# Altium PCB Twitch_Switch_PCB.PcbDoc (part 2 of 3)
Units mil, origin at the board's own origin, x right, y up, seen from the top; angles counter-clockwise.
Board outline 3095 x 1923 mil, 2 copper layers (Top Layer, Bottom Layer); 103 components, 59 nets, 319 pads, 189 vias.
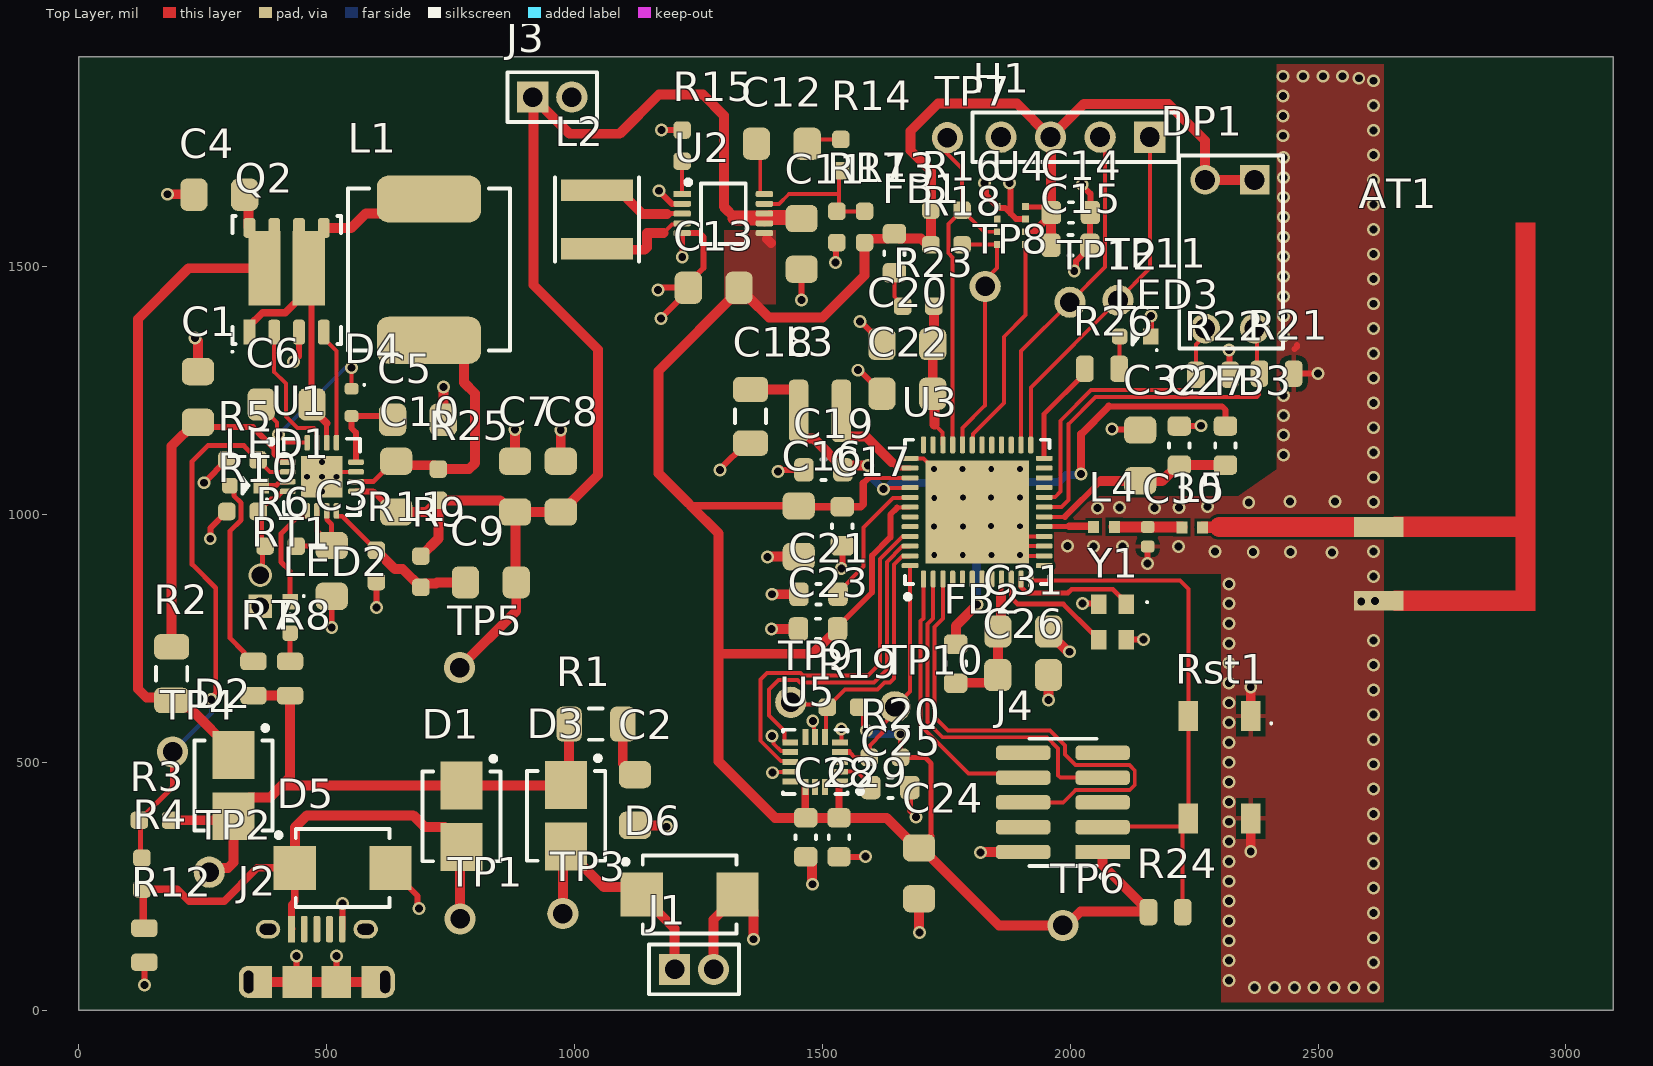
[diagram p0: Top Layer view]

## Part data (continued)
J2: "10118194-0001LF micro-USB paste-in-pad", Color=Black, Current Rating="1.8 A", Flammability Rating="UL 94 V-0", Insulation Resistance="1000 MOhms", Manufacturer=FCI, Manufacturer Part Number=10118194-0001LF, Operating Temperature Range="- 55 C to + 85 C", Supplier Part Number 1=609-4618-1-ND, .Creator="Kailey Shara", .PCBchecked=KS, .SCHchecked=KS, Brand=FCI, Category="Connectors, Interconnects", ComponentLink1Description=http://portal.fciconnect.com/Comergent//fci/drawing/10118194.pdf, ComponentLink1URL=http://portal.fciconnect.com/Comergent//fci/drawing/10118194.pdf, Connector Type="USB - micro B", Contact Material="Copper Alloy", Contact Plating=Gold, Features="Shielded, Solder Retention", Gender=Receptacle, Ingress Protection=-, Minimum Order Quantity=1, Mounting Angle=Right, Mounting Type="Surface Mount, Right Angle, Horizontal", Number of Contacts=5, Packaging="Cut Tape (CT)", Pricing 1="1=0.46, 10=0.433, 25=0.3712, 50=0.3156, 100=0.3032, 250=0.27224, 500=0.25988 (USD)", Product="Micro USB Type B Connectors", Reeling=True, RoHS="RoHS Compliant", Specifications="USB 2.0", Standard="USB 2.0", Standard Pack Qty=1200, Stock 1=27978, Supplier 1=Digi-Key, Termination Style=SMD
J4: library part FTSH-105-01-L-DV-K-TR, "SAMTEC - FTSH-105-01-L-DV-K-TR - Pin Header, Wire-to-Board, 1.27 mm, 2 Rows, 10 Contacts, Surface Mount, FTSH Series", Color=Black, Current Rating=1.75A, Manufacturer=Samtec, Max Operating Temperature=125°C, Min Operating Temperature=-55°C, Package Quantity=550, Category="Headers and Wire Housings", ComponentLink1Description=https://datasheet.ciiva.com/10245/ftsh-mt-10245289.pdf?src-supplier=Avnet, ComponentLink1URL=https://datasheet.ciiva.com/10245/ftsh-mt-10245289.pdf?src-supplier=Avnet, ComponentLink2Description=https://datasheet.ciiva.com/739/ftsh-1xx-xx-xxx-dv-xxx-mkt-739005.pdf?src-supplier=Digi-Key, ComponentLink2URL=https://datasheet.ciiva.com/739/ftsh-1xx-xx-xxx-dv-xxx-mkt-739005.pdf?src-supplier=Digi-Key, ComponentLink3Description=https://datasheet.ciiva.com/23735/81359-23735917.pdf?src-supplier=Newark, ComponentLink3URL=https://datasheet.ciiva.com/23735/81359-23735917.pdf?src-supplier=Newark, Connector Type="Male Pin", Contact Material=Bronze, Contact Mating Length=0.12inch, Contact Plating=Gold, Contact Type="Male Pin", Depth=3.43mm, Gender=Male, Housing Color=Black, Housing Material=Polymer, Lead Free="Lead Free", Length=6.35mm, Manufacturer Part Number=FTSH-105-01-L-DV-K-TR, Max Current Rating=1.75A, Mount="Surface Mount", Number of Contacts=10, Number of Positions=10, Number of Rows=2, Orientation=Straight, Packaging="Tape and Reel", Pitch=1.27mm, Pricing 1="1=3.28000, 10=3.14400, 100=2.62000 (USD)", Radiation Hardening=No, REACH SVHC="No SVHC", RoHS=Yes, RoHS Compliant=Yes, Row Spacing=0.05inch, Series=FTSH, Stock 1=12516, Supplier 1=Digi-Key, Termination=Solder
L1: library part IHLP3232DZER150M11, "Inductor High Current Shielded Wirewound 15uH 20% 100KHz 4.9A 65.3mOhm DCR 3232 T/R", Case/Package=3232, Current Rating=4.9A, DC Resistance (DCR)=65.3mR, Inductance=15uH, Inductance Tolerance=20%, Manufacturer="Vishay Dale", Max DC Current=3.7A, Max Operating Temperature=125°C, Min Operating Temperature=-55°C, Package Quantity=500, Self Resonant Frequency=10.3MHz, Test Frequency=100kHz, Category="Fixed Inductors", ComponentLink1Description=https://datasheet.ciiva.com/6692/ihlp-3232dz-11-6692869.pdf?src-supplier=Digi-Key, ComponentLink1URL=https://datasheet.ciiva.com/6692/ihlp-3232dz-11-6692869.pdf?src-supplier=Digi-Key, ComponentLink2Description=https://datasheet.ciiva.com/6692/ihlp-3232dz-11-6692871.pdf?src-supplier=Digi-Key, ComponentLink2URL=https://datasheet.ciiva.com/6692/ihlp-3232dz-11-6692871.pdf?src-supplier=Digi-Key, ComponentLink3Description=https://datasheet.ciiva.com/6692/ihlp-3232dz-11-6692872.pdf?src-supplier=Digi-Key, ComponentLink3URL=https://datasheet.ciiva.com/6692/ihlp-3232dz-11-6692872.pdf?src-supplier=Digi-Key, ComponentLink4Description=https://datasheet.ciiva.com/8494/ihlp3232dz11-8494905.pdf?src-supplier=Avnet, ComponentLink4URL=https://datasheet.ciiva.com/8494/ihlp3232dz11-8494905.pdf?src-supplier=Avnet, Contact Plating=Tin, Core Material=Ferrite, Depth=8.26mm, Height=4mm, Height - Seated (Max)=0.157inch, Lead Free="Lead Free", Length=8.89mm, Manufacturer Part Number=IHLP3232DZER150M11, Military Standard=Not, Mount="Surface Mount", Number of Pins=2, Packaging="Tape and Reel", Pricing 1="1=1.37000, 10=1.26800, 25=1.17040, 50=0.97520, 100=0.91670, 250=0.81916 (USD)", Radiation Hardening=No, REACH SVHC=Unknown, RMS Current (Irms)=4.9A, RoHS=Yes, RoHS Compliant=Yes, Saturation Current=3.7A, Series=IHLP-3232DZ-11, Shielding=Shielded, Stock 1=5273, Supplier 1=Digi-Key, Termination=SMD/SMT, Tolerance=20%, Width=0.322inch
L2: library part TYA4020100M-10, "FIXED IND 10UH 2A 220 MOHM SMD", Manufacturer=Laird, Manufacturer Part Number=TYA4020100M-10, RoHS=No, Supplier 1=Digi-Key
L3: library part 744029004, "Inductor, SMD Temperature range: -40 ... +125 °C Size: 2813: A/B/C/D/E = 2.8/2.8/1.35/0.9/0.9 mm Tolerance: ±30% Type...", Case/Package=Nonstandard, Current Rating=1A, DC Resistance (DCR)=200mR, Inductance=4.7uH, Inductance Tolerance=30%, Manufacturer="Wurth Electronics", Max DC Current=1.2A, Max Operating Temperature=125°C, Min Operating Temperature=-40°C, Package Quantity=1200, Resistor Type=Wirewound, Saturation Current=800mA, Self Resonant Frequency=65MHz, Test Frequency=100kHz, Category="Fixed Inductors", ComponentLink1Description=https://datasheet.ciiva.com/11802/0900766b80d7f1cb-11802019.pdf?src-supplier=RSComponents, ComponentLink1URL=https://datasheet.ciiva.com/11802/0900766b80d7f1cb-11802019.pdf?src-supplier=RSComponents, ComponentLink2Description=https://datasheet.ciiva.com/1050/744029004-1050762.pdf?src-supplier=Digi-Key, ComponentLink2URL=https://datasheet.ciiva.com/1050/744029004-1050762.pdf?src-supplier=Digi-Key, ComponentLink3Description=https://datasheet.ciiva.com/4961/744029004-72684-4961071.pdf?src-supplier=Mouser, ComponentLink3URL=https://datasheet.ciiva.com/4961/744029004-72684-4961071.pdf?src-supplier=Mouser, ComponentLink4Description=https://datasheet.ciiva.com/22702/69358-22702629.pdf?src-supplier=Element14, ComponentLink4URL=https://datasheet.ciiva.com/22702/69358-22702629.pdf?src-supplier=Element14, ComponentLink5Description=https://datasheet.ciiva.com/1050/744029004-1050763.pdf?src-supplier=Digi-Key, ComponentLink5URL=https://datasheet.ciiva.com/1050/744029004-1050763.pdf?src-supplier=Digi-Key, ComponentLink6Description=https://datasheet.ciiva.com/1050/744029004-1050764.pdf?src-supplier=Digi-Key, ComponentLink6URL=https://datasheet.ciiva.com/1050/744029004-1050764.pdf?src-supplier=Digi-Key, ComponentLink7Description=https://datasheet.ciiva.com/14123/744029004-ch-ger-eng-ds-14123820.pdf?src-supplier=Distrelec, ComponentLink7URL=https://datasheet.ciiva.com/14123/744029004-ch-ger-eng-ds-14123820.pdf?src-supplier=Distrelec, Core Material=Ferrite, Depth=2.8mm, Height=1.35mm, Height - Seated (Max)=0.059inch, Length=2.8mm, Manufacturer Part Number=744029004, Mount="Surface Mount", Number of Pins=2, Packaging="Cut Tape", Pricing 1="1=1.43000, 10=1.38900, 50=1.21500, 100=1.14600, 500=0.98000 (USD)", REACH SVHC=Unknown, RMS Current (Irms)=1A, RoHS=Yes, RoHS Compliant=Yes, Series=WE-TPC, Series Resistance=200mR, Shielding=Shielded, Stock 1=14904, Supplier 1=Digi-Key, Termination=SMD/SMT, Tolerance=30%, Width=2.8mm
L4 L5: library part LQG15HS22NJ02D, "Fixed Inductors 22nH 5% Hi-Freq", Case Code (Imperial)=0402, Case Code (Metric)=1005, Current Rating=300mA, DC Resistance (DCR)=420mR, Inductance=22nH, Manufacturer=Murata, Max Operating Temperature=125°C, Min Operating Temperature=-55°C, Package Quantity=10000, Self Resonant Frequency=1.9GHz, Test Frequency=100MHz, Tolerance=5%, Case/Package=0402, Category="Fixed Inductors", ComponentLink1Description=https://datasheet.ciiva.com/11801/0900766b80f10809-11801427.pdf?src-supplier=RSComponents, ComponentLink1URL=https://datasheet.ciiva.com/11801/0900766b80f10809-11801427.pdf?src-supplier=RSComponents, ComponentLink2Description=https://datasheet.ciiva.com/18088/getdatasheetpartid-55811-18088843.pdf?src-supplier=Verical, ComponentLink2URL=https://datasheet.ciiva.com/18088/getdatasheetpartid-55811-18088843.pdf?src-supplier=Verical, ComponentLink3Description=https://datasheet.ciiva.com/1038/l0075s0083lqg15hs-1038108.pdf?src-supplier=Digi-Key, ComponentLink3URL=https://datasheet.ciiva.com/1038/l0075s0083lqg15hs-1038108.pdf?src-supplier=Digi-Key, ComponentLink4Description=https://datasheet.ciiva.com/3082/l0075s0083lqg15hs-3082178.pdf?src-supplier=Avnet, ComponentLink4URL=https://datasheet.ciiva.com/3082/l0075s0083lqg15hs-3082178.pdf?src-supplier=Avnet, ComponentLink5Description=https://datasheet.ciiva.com/16444/l0075s0083lqg15hs-16444393.pdf?src-supplier=Future+Electronics, ComponentLink5URL=https://datasheet.ciiva.com/16444/l0075s0083lqg15hs-16444393.pdf?src-supplier=Future+Electronics, ComponentLink6Description=https://datasheet.ciiva.com/1038/l0075s0083lqg15hs-1038106.pdf?src-supplier=Digi-Key, ComponentLink6URL=https://datasheet.ciiva.com/1038/l0075s0083lqg15hs-1038106.pdf?src-supplier=Digi-Key, ComponentLink7Description=https://datasheet.ciiva.com/17279/l0075s0083lqg15hs-17279242.pdf?src-supplier=Avnet+Europe, ComponentLink7URL=https://datasheet.ciiva.com/17279/l0075s0083lqg15hs-17279242.pdf?src-supplier=Avnet+Europe, ComponentLink8Description=https://datasheet.ciiva.com/1038/l0075s0083lqg15hs-1038107.pdf?src-supplier=Digi-Key, ComponentLink8URL=https://datasheet.ciiva.com/1038/l0075s0083lqg15hs-1038107.pdf?src-supplier=Digi-Key, Core Material=Air, DC Current=300mA, Depth=0.55mm, Height=0.5mm, Height - Seated (Max)=0.022inch, Lead Free="Lead Free", Length=1mm, Manufacturer Part Number=LQG15HS22NJ02D, Max DC Current=300mA, Military Standard=Not, Mount="Surface Mount", Packaging="Tape and Reel", Pricing 1="1=0.10000, 10=0.05300, 25=0.04680, 50=0.03980, 100=0.03510, 250=0.03216, 500=0.02924, 1000=0.02457, 2500=0.02106 (USD)", Q Factor=8, Radiation Hardening=No, Rated Current-Max=300mA, RoHS=Yes, RoHS Compliant=Yes, Series=LQG15HS, Shielding=Unshielded, Stock 1=109500, Supplier 1=Digi-Key, Termination=SMD/SMT, Width=0.02inch
LED1 LED2 LED3: library part 150060GS75000, "LED, 0603, GREEN, 430MCD, 520NM", Color=Green, Current - Test=20mA, Manufacturer="Wurth Electronics", Millicandela Rating=430mcd, Package / Case="0603 (1608 Metric)", Standard Package=4,000, Supplier Part Number 1=732-4971-1-ND, Voltage - Forward (Vf) (Typ)=3.2V, 3D Model="SMCW_0603.igs /  / SMCW_0603.stp /  / SMCW_0603.wrl", Category=Optoelectronics, ComponentLink1Description=https://katalog.we-online.de/led/datasheet/150060GS75000.pdf?src-supplier=Digi-Key, ComponentLink1URL=https://katalog.we-online.de/led/datasheet/150060GS75000.pdf?src-supplier=Digi-Key, ComponentLink2Description=http://www.produktinfo.conrad.com/datenblaetter/750000-774999/759427-da-01-en-CHIPLED_0603_W_KL_GRUEN_150060GS75000.pdf?src-supplier=Conrad, ComponentLink2URL=http://www.produktinfo.conrad.com/datenblaetter/750000-774999/759427-da-01-en-CHIPLED_0603_W_KL_GRUEN_150060GS75000.pdf?src-supplier=Conrad, Dynamic Catalog="0603 Rectangle with Flat Top Chip LEDs", Family="LED Indication - Discrete", Height=0.70mm, Lens Style/Size="Rectangle with Flat Top, 1.1mm x 0.7mm", Lens Type=Clear, Manufacturer Part Number=150060GS75000, Mounting Type="Surface Mount", Online Catalog="0603 Rectangle with Flat Top Chip LEDs", Other Names=732-4971-2, Packaging="Tape & Reel (TR)", Pricing 1="1=0.14, 50=0.129, 100=0.11, 500=0.095 (USD)", Series=WL-SMCW, Size / Dimension="1.60mm L x 0.80mm W", Stock 1=34964, Supplier 1=Digi-Key, Viewing Angle=140°, Wavelength - Dominant=520nm, Wavelength - Peak=515nm
Q2: library part SI7288DP-T1-GE3, "VISHAY - SI7288DP-T1-GE3 - MOSFET, DUAL N-CH, 40V, 20A, POWERPAK SO", Continuous Drain Current (ID)=20A, Drain to Source Breakdown Voltage=40V, Drain to Source Resistance=15.6mR, Gate to Source Voltage (Vgs)=20V, Input Capacitance=565pF, Manufacturer="Vishay Siliconix", Max Operating Temperature=150°C, Max Power Dissipation=15.6W, Min Operating Temperature=-55°C, On-State Resistance=19mR, Package Quantity=1, Power Dissipation=3.6W, Threshold Voltage=2.8V, Category=MOSFETs, ComponentLink1Description=https://datasheet.ciiva.com/1253/si7288dp-1253714.pdf?src-supplier=Newark, ComponentLink1URL=https://datasheet.ciiva.com/1253/si7288dp-1253714.pdf?src-supplier=Newark, ComponentLink2Description=https://datasheet.ciiva.com/4442/si7288dp-244449-4442467.pdf?src-supplier=Mouser, ComponentLink2URL=https://datasheet.ciiva.com/4442/si7288dp-244449-4442467.pdf?src-supplier=Mouser, ComponentLink3Description=https://datasheet.ciiva.com/928/si7288dp-928419.pdf?src-supplier=Digi-Key, ComponentLink3URL=https://datasheet.ciiva.com/928/si7288dp-928419.pdf?src-supplier=Digi-Key, ComponentLink4Description=https://datasheet.ciiva.com/928/si7288dp-928420.pdf?src-supplier=Digi-Key, ComponentLink4URL=https://datasheet.ciiva.com/928/si7288dp-928420.pdf?src-supplier=Digi-Key, ComponentLink5Description=https://datasheet.ciiva.com/928/si7288dp-928421.pdf?src-supplier=Digi-Key, ComponentLink5URL=https://datasheet.ciiva.com/928/si7288dp-928421.pdf?src-supplier=Digi-Key, ComponentLink6Description=https://datasheet.ciiva.com/11161/si7288dp-11161495.pdf?src-supplier=Avnet, ComponentLink6URL=https://datasheet.ciiva.com/11161/si7288dp-11161495.pdf?src-supplier=Avnet, ComponentLink7Description=https://datasheet.ciiva.com/26135/si7288dp-26135833.pdf?src-supplier=Avnet+Europe, ComponentLink7URL=https://datasheet.ciiva.com/26135/si7288dp-26135833.pdf?src-supplier=Avnet+Europe, ComponentLink8Description=https://datasheet.ciiva.com/16287/si7288dp-16287085.pdf?src-supplier=Future+Electronics, ComponentLink8URL=https://datasheet.ciiva.com/16287/si7288dp-16287085.pdf?src-supplier=Future+Electronics, Contact Plating=Tin,Matte, Drain to Source Voltage (Vdss)=40V, Element Configuration=Dual, Fall Time=10ns, FET Type="2 N-Channel", Lead Free="Lead Free", Manufacturer Part Number=SI7288DP-T1-GE3, Mount="Surface Mount", Nominal Vgs=1.2V, Number of Channels=2, Number of Elements=2, Number of Pins=8, Packaging="Tape and Reel", Pricing 1="1=1.60000, 10=1.30700, 25=1.28240, 100=1.01640, 500=0.86152, 1000=0.70180 (USD)", Radiation Hardening=No, Rds On Max=19mR, REACH SVHC=Unknown, Rise Time=14ns, RoHS=Yes, Stock 1=23843, Supplier 1=Digi-Key, Turn-Off Delay Time=16ns, Turn-On Delay Time=12ns
R1: library part CRM1206-JW-2R2ELF, "BOURNS - CRM1206-JW-2R2ELF - SMD Current Sense Resistor, 2.2 ohm, CRM Series, 1206 [3216 Metric], 500 mW, ± 5%, Thick Film", Case Code (Imperial)=1206, Case Code (Metric)=3216, Manufacturer=Bourns, Max Operating Temperature=155°C, Max Power Dissipation=500mW, Min Operating Temperature=-55°C, Package Quantity=5000, Resistance=2.2R, Resistance Tolerance=5%, Resistor Type="Thick Film", Temperature Coefficient=200ppm/°C, Voltage Rating=200V, Case/Package=1206, Category="Chip SMD Resistors", ComponentLink1Description=https://datasheet.ciiva.com/9123/crm0805-1206-2010-9123253.pdf?src-supplier=Avnet, ComponentLink1URL=https://datasheet.ciiva.com/9123/crm0805-1206-2010-9123253.pdf?src-supplier=Avnet, ComponentLink2Description=https://datasheet.ciiva.com/7985/1859481-7985944.pdf?src-supplier=Element14, ComponentLink2URL=https://datasheet.ciiva.com/7985/1859481-7985944.pdf?src-supplier=Element14, ComponentLink3Description=https://datasheet.ciiva.com/6562/crm0805-1206-2010-6562779.pdf?src-supplier=Digi-Key, ComponentLink3URL=https://datasheet.ciiva.com/6562/crm0805-1206-2010-6562779.pdf?src-supplier=Digi-Key, ComponentLink4Description=https://datasheet.ciiva.com/6562/crm0805-1206-2010-6562780.pdf?src-supplier=Digi-Key, ComponentLink4URL=https://datasheet.ciiva.com/6562/crm0805-1206-2010-6562780.pdf?src-supplier=Digi-Key, ComponentLink5Description=https://datasheet.ciiva.com/6562/crm0805-1206-2010-6562782.pdf?src-supplier=Digi-Key, ComponentLink5URL=https://datasheet.ciiva.com/6562/crm0805-1206-2010-6562782.pdf?src-supplier=Digi-Key, ComponentLink6Description=https://datasheet.ciiva.com/16929/crm0805-1206-2010-16929262.pdf?src-supplier=Avnet+Europe, ComponentLink6URL=https://datasheet.ciiva.com/16929/crm0805-1206-2010-16929262.pdf?src-supplier=Avnet+Europe, Construction=Rectangular, Depth=1.6mm, Height=0.026inch, Length=3.1mm, Manufacturer Part Number=CRM1206-JW-2R2ELF, Military Standard=Not, Number of Pins=2, Number of Terminations=2, Packaging="Cut Tape", Power Rating=500mW, Pricing 1="1=0.14000, 10=0.12200, 25=0.08480, 50=0.06580, 100=0.04700, 250=0.03664, 500=0.02914, 1000=0.02068 (USD)", REACH SVHC="No SVHC", RoHS=Yes, RoHS Compliant=Yes, Series=CRM1206, Stock 1=20424, Supplier 1=Digi-Key, Tolerance=5%, Voltage Rating (DC)=200V, Width=0.063inch
R2: library part ERJ8ENF10R0V, "PANASONIC - ERJ8ENF10R0V - SMD Chip Resistor, 1206 [3216 Metric], 10 ohm, ERJ8EN Series, 200 V, Thick Film, 250 mW", Case Code (Imperial)=1206, Case Code (Metric)=3216, Manufacturer=Panasonic, Max Operating Temperature=155°C, Max Power Dissipation=250mW, Min Operating Temperature=-55°C, Package Quantity=5000, Resistance Tolerance=1%, Resistor Type="Thick Film", Temperature Coefficient=100ppm/°C, Voltage Rating=200V, Case/Package=1206, Category="Chip SMD Resistors", ComponentLink1Description=https://datasheet.ciiva.com/7802/426256-7802460.pdf?src-supplier=Element14, ComponentLink1URL=https://datasheet.ciiva.com/7802/426256-7802460.pdf?src-supplier=Element14, ComponentLink2Description=https://datasheet.ciiva.com/16758/70260748-16758703.pdf?src-supplier=Allied+Electronics, ComponentLink2URL=https://datasheet.ciiva.com/16758/70260748-16758703.pdf?src-supplier=Allied+Electronics, ComponentLink3Description=https://datasheet.ciiva.com/24069/aoa0000ce2-24069071.pdf?src-supplier=Mouser, ComponentLink3URL=https://datasheet.ciiva.com/24069/aoa0000ce2-24069071.pdf?src-supplier=Mouser, ComponentLink4Description=https://datasheet.ciiva.com/6082/426256-6082197.pdf?src-supplier=Farnell, ComponentLink4URL=https://datasheet.ciiva.com/6082/426256-6082197.pdf?src-supplier=Farnell, ComponentLink5Description=https://datasheet.ciiva.com/16724/70260748-16724651.pdf?src-supplier=Allied+Electronics, ComponentLink5URL=https://datasheet.ciiva.com/16724/70260748-16724651.pdf?src-supplier=Allied+Electronics, ComponentLink6Description=https://datasheet.ciiva.com/46372/1678782-46372959.pdf?src-supplier=Element14, ComponentLink6URL=https://datasheet.ciiva.com/46372/1678782-46372959.pdf?src-supplier=Element14, Construction=Rectangular, Contact Plating=Tin, Depth=1.6mm, Features="Automotive AEC-Q200", Height=0.6mm, Lead Free="Lead Free", Length=3.2mm, Manufacturer Part Number=ERJ8ENF10R0V, Military Standard=Not, Mount="Surface Mount", Number of Pins=2, Number of Terminations=2, Packaging="Tape and Reel", Power Rating=250mW, Pricing 1="1=0.10000, 10=0.08900, 100=0.03410, 1000=0.01500, 2500=0.01296 (USD)", Radiation Hardening=No, REACH SVHC="No SVHC", Resistance=10R, RoHS=Yes, RoHS Compliant=Yes, Series=ERJ, Size Code=1206, Stock 1=395438, Supplier 1=Digi-Key, Termination=SMD/SMT, Tolerance=1%, Voltage Rating (DC)=200V, Width=1.6mm
R3: library part CRCW060360K4FKEA, "VISHAY - CRCW060360K4FKEA - SMD Chip Resistor, 0603 [1608 Metric], 60.4 kohm, CRCW e3 Series, 75 V, Thick Film, 100 mW", Case Code (Imperial)=0603, Case Code (Metric)=1608, Manufacturer=Vishay, Max Operating Temperature=155°C, Max Power Dissipation=100mW, Min Operating Temperature=-55°C, Package Quantity=10, Resistance=60.4kR, Resistance Tolerance=1%, Resistor Type="Thick Film", Temperature Coefficient=100ppm/°C, Voltage Rating=75V, Case/Package=0603, Category="Chip SMD Resistors", ComponentLink1Description=https://datasheet.ciiva.com/11809/0900766b80d98afc-11809685.pdf?src-supplier=RSComponents, ComponentLink1URL=https://datasheet.ciiva.com/11809/0900766b80d98afc-11809685.pdf?src-supplier=RSComponents, ComponentLink2Description=https://datasheet.ciiva.com/16391/dcrcwe3-16391304.pdf?src-supplier=Future+Electronics, ComponentLink2URL=https://datasheet.ciiva.com/16391/dcrcwe3-16391304.pdf?src-supplier=Future+Electronics, ComponentLink3Description=https://datasheet.ciiva.com/16893/dcrcwe3-16893592.pdf?src-supplier=Avnet+Europe, ComponentLink3URL=https://datasheet.ciiva.com/16893/dcrcwe3-16893592.pdf?src-supplier=Avnet+Europe, ComponentLink4Description=https://datasheet.ciiva.com/3257/dcrcwe3-3257786.pdf?src-supplier=Avnet, ComponentLink4URL=https://datasheet.ciiva.com/3257/dcrcwe3-3257786.pdf?src-supplier=Avnet, ComponentLink5Description=https://datasheet.ciiva.com/2494/dcrcwe3-2494471.pdf?src-supplier=Digi-Key, ComponentLink5URL=https://datasheet.ciiva.com/2494/dcrcwe3-2494471.pdf?src-supplier=Digi-Key, ComponentLink6Description=https://datasheet.ciiva.com/16760/70201119-16760503.pdf?src-supplier=Allied+Electronics, ComponentLink6URL=https://datasheet.ciiva.com/16760/70201119-16760503.pdf?src-supplier=Allied+Electronics, ComponentLink7Description=https://datasheet.ciiva.com/2494/dcrcwe3-2494472.pdf?src-supplier=Digi-Key, ComponentLink7URL=https://datasheet.ciiva.com/2494/dcrcwe3-2494472.pdf?src-supplier=Digi-Key, ComponentLink8Description=https://datasheet.ciiva.com/22676/1847332-22676330.pdf?src-supplier=Element14, ComponentLink8URL=https://datasheet.ciiva.com/22676/1847332-22676330.pdf?src-supplier=Element14, ComponentLink9Description=https://datasheet.ciiva.com/7816/1697337-7816053.pdf?src-supplier=Element14, ComponentLink9URL=https://datasheet.ciiva.com/7816/1697337-7816053.pdf?src-supplier=Element14, ComponentLink10Description=https://datasheet.ciiva.com/2494/dcrcwe3-2494473.pdf?src-supplier=Digi-Key, ComponentLink10URL=https://datasheet.ciiva.com/2494/dcrcwe3-2494473.pdf?src-supplier=Digi-Key, ComponentLink11Description=https://datasheet.ciiva.com/5545/dcrcwe3-109170-5545721.pdf?src-supplier=Mouser, ComponentLink11URL=https://datasheet.ciiva.com/5545/dcrcwe3-109170-5545721.pdf?src-supplier=Mouser, ComponentLink12Description=https://datasheet.ciiva.com/3257/dcrcwe3-3257787.pdf?src-supplier=Avnet, ComponentLink12URL=https://datasheet.ciiva.com/3257/dcrcwe3-3257787.pdf?src-supplier=Avnet, Construction=Rectangular, Contact Plating=Tin, Depth=0.85mm, Features="Automotive AEC-Q200", Height=0.45mm, Lead Free="Lead Free", Length=1.55mm, Manufacturer Part Number=CRCW060360K4FKEA, Military Standard=Not, Number of Terminations=2, Packaging="Tape and Reel", Power Rating=100mW, Pricing 1="1=0.10000, 10=0.03400, 100=0.01390, 1000=0.00624, 2500=0.00542 (USD)", Radiation Hardening=No, REACH SVHC=Unknown, RoHS=Yes, RoHS Compliant=Yes, Series=CRCW, Size Code=0603, Stock 1=18673, Supplier 1=Digi-Key, Technology="THICK FILM", Termination=SMD/SMT, Tolerance=1%, Voltage Rating (DC)=75V, Weight=7.1E-05oz, Width=0.033inch
R4: library part CRCW0603470KFKEA, "VISHAY - CRCW0603470KFKEA - SMD Chip Resistor, 0603 [1608 Metric], 470 kohm, CRCW e3 Series, 75 V, Thick Film, 100 mW", Case Code (Imperial)=0603, Case Code (Metric)=1608, Manufacturer=Vishay, Max Operating Temperature=155°C, Max Power Dissipation=100mW, Min Operating Temperature=-55°C, Package Quantity=10, Resistance=470kR, Resistance Tolerance=1%, Resistor Type="Thick Film", Temperature Coefficient=100ppm/°C, Voltage Rating=75V, Case/Package=0603, Category="Chip SMD Resistors", ComponentLink1Description=https://datasheet.ciiva.com/11809/0900766b80d98afc-11809059.pdf?src-supplier=RSComponents, ComponentLink1URL=https://datasheet.ciiva.com/11809/0900766b80d98afc-11809059.pdf?src-supplier=RSComponents, ComponentLink2Description=https://datasheet.ciiva.com/2466/dcrcwe3-2466326.pdf?src-supplier=Digi-Key, ComponentLink2URL=https://datasheet.ciiva.com/2466/dcrcwe3-2466326.pdf?src-supplier=Digi-Key, ComponentLink3Description=https://datasheet.ciiva.com/2466/dcrcwe3-2466327.pdf?src-supplier=Digi-Key, ComponentLink3URL=https://datasheet.ciiva.com/2466/dcrcwe3-2466327.pdf?src-supplier=Digi-Key, ComponentLink4Description=https://datasheet.ciiva.com/2466/dcrcwe3-2466328.pdf?src-supplier=Digi-Key, ComponentLink4URL=https://datasheet.ciiva.com/2466/dcrcwe3-2466328.pdf?src-supplier=Digi-Key, ComponentLink5Description=https://datasheet.ciiva.com/7673/1720486-7673467.pdf?src-supplier=Element14, ComponentLink5URL=https://datasheet.ciiva.com/7673/1720486-7673467.pdf?src-supplier=Element14, ComponentLink6Description=https://datasheet.ciiva.com/16430/dcrcwe3-16430126.pdf?src-supplier=Future+Electronics, ComponentLink6URL=https://datasheet.ciiva.com/16430/dcrcwe3-16430126.pdf?src-supplier=Future+Electronics, ComponentLink7Description=https://datasheet.ciiva.com/5551/dcrcwe3-109170-5551097.pdf?src-supplier=Mouser, ComponentLink7URL=https://datasheet.ciiva.com/5551/dcrcwe3-109170-5551097.pdf?src-supplier=Mouser, ComponentLink8Description=https://datasheet.ciiva.com/16760/70201119-16760810.pdf?src-supplier=Allied+Electronics, ComponentLink8URL=https://datasheet.ciiva.com/16760/70201119-16760810.pdf?src-supplier=Allied+Electronics, ComponentLink9Description=https://datasheet.ciiva.com/7673/1697337-7673309.pdf?src-supplier=Element14, ComponentLink9URL=https://datasheet.ciiva.com/7673/1697337-7673309.pdf?src-supplier=Element14, ComponentLink10Description=https://datasheet.ciiva.com/26317/fld-crcw-e3-data-en-26317181.pdf?src-supplier=Distrelec, ComponentLink10URL=https://datasheet.ciiva.com/26317/fld-crcw-e3-data-en-26317181.pdf?src-supplier=Distrelec, Construction=Rectangular, Contact Plating=Tin, Depth=0.85mm, Features="Automotive AEC-Q200", Height=0.45mm, Lead Free="Lead Free", Length=1.55mm, Manufacturer Part Number=CRCW0603470KFKEA, Military Standard=Not, Mount="Surface Mount", Number of Pins=2, Number of Terminations=2, Packaging="Tape and Reel", Power Rating=100mW, Pricing 1="1=0.10000, 10=0.03400, 100=0.01390, 1000=0.00624, 2500=0.00542 (USD)", Radiation Hardening=No, REACH SVHC=Unknown, RoHS=Yes, RoHS Compliant=Yes, Series=CRCW, Size Code=0603, Stock 1=4420, Supplier 1=Digi-Key, Technology="THICK FILM", Termination=SMD/SMT, Tolerance=1%, Voltage Rating (DC)=75V, Weight=7.1E-05oz, Width=0.033inch
R5: library part CRCW060316K9FKEAHP, "RES SMD 16.9K OHM 1% 1/4W 0603", Case/Package=0603, Manufacturer="Vishay Dale", Max Power Dissipation=250mW, Package Quantity=5000, Resistance=16.9kR, Resistor Type="Thick Film", Temperature Coefficient=100ppm/°C, Tolerance=1%, Category="Chip SMD Resistors", ComponentLink1Description=https://datasheet.ciiva.com/2576/crcwhpe3-2576879.pdf?src-supplier=Digi-Key, ComponentLink1URL=https://datasheet.ciiva.com/2576/crcwhpe3-2576879.pdf?src-supplier=Digi-Key, Features="Automotive AEC-Q200", Height=0.022inch, Lead Free="Lead Free", Length=0.063inch, Manufacturer Part Number=CRCW060316K9FKEAHP, Number of Terminations=2, Packaging="Tape and Reel", Pricing 1="1=0.17000, 10=0.14200, 100=0.05530, 1000=0.02317, 2500=0.02124 (USD)", RoHS=Yes, RoHS Compliant=Yes, Series=CRCW-HP, Stock 1=4990, Supplier 1=Digi-Key, Width=0.033inch
R6 R16 R18 R19 R20: library part RMCF0603FT5K23, "RES SMD 5.23K OHM 1% 1/10W 0603", Case Code (Imperial)=0603, Case Code (Metric)=1608, Manufacturer="Stackpole Electronics", Max Operating Temperature=155°C, Max Power Dissipation=100mW, Min Operating Temperature=-55°C, Resistance=5.23kR, Resistor Type="Thick Film", Temperature Coefficient=100ppm/°C, Tolerance=1%, Case/Package=0603, Category="Chip SMD Resistors", ComponentLink1Description=https://www.seielect.com/Catalog/SEI-RMCF_RMCP.pdf?src-supplier=Digi-Key, ComponentLink1URL=https://www.seielect.com/Catalog/SEI-RMCF_RMCP.pdf?src-supplier=Digi-Key, ComponentLink2Description=https://www.seielect.com/catalog/SEI-Packaging.pdf?src-supplier=Digi-Key, ComponentLink2URL=https://www.seielect.com/catalog/SEI-Packaging.pdf?src-supplier=Digi-Key, ComponentLink3Description=https://www.seielect.com/catalog/SEI-RMCF_RMCP.pdf?src-supplier=Avnet, ComponentLink3URL=https://www.seielect.com/catalog/SEI-RMCF_RMCP.pdf?src-supplier=Avnet, Contact Plating=Tin,Matte, Features="Automotive AEC-Q200", Height=0.022inch, Lead Free="Lead Free", Length=0.061inch, Manufacturer Part Number=RMCF0603FT5K23, Mount="Surface Mount", Number of Terminations=2, Packaging="Tape and Reel", Pricing 1="1=0.10000, 10=0.01600, 100=0.00650, 1000=0.00292, 2500=0.00253 (USD)", Radiation Hardening=No, RoHS=Yes, RoHS Compliant=Yes, Series=RMCF, Stock 1=29980, Supplier 1=Digi-Key, Width=0.031inch
R7 R8 R12 R21 R22 R24 R26: library part RMCF0805FT10K0, "RES 10K OHM 1% 1/8W 0805", Case Code (Imperial)=0805, Case Code (Metric)=2012, Manufacturer="Stackpole Electronics", Max Operating Temperature=155°C, Max Power Dissipation=125mW, Min Operating Temperature=-55°C, Resistance=10kR, Resistor Type="Thick Film", Temperature Coefficient=100ppm/°C, Tolerance=1%, Case/Package=0805, Category="Chip SMD Resistors", ComponentLink1Description=https://datasheet.ciiva.com/15193/getdatasheetpartid-362046-15193525.pdf?src-supplier=Verical, ComponentLink1URL=https://datasheet.ciiva.com/15193/getdatasheetpartid-362046-15193525.pdf?src-supplier=Verical, Construction=Rectangular, Contact Plating=Tin,Matte, Depth=1.25mm, Features="Automotive AEC-Q200", Height=0.026inch, Lead Free="Lead Free", Length=2mm, Manufacturer Part Number=RMCF0805FT10K0, Military Standard=Not, Mount="Surface Mount", Number of Terminations=2, Packaging="Tape and Reel", Power Rating=125mW, Pricing 1="1=0.10000, 10=0.02600, 100=0.01040, 1000=0.00466, 2500=0.00405 (USD)", Radiation Hardening=No, RoHS=Yes, RoHS Compliant=Yes, Series=RMCF, Size Code=0805, Stock 1=2466676, Supplier 1=Digi-Key, Width=0.049inch
R9 R11: library part RC0603FR-07100KL, "RES SMD 100K OHM 1% 1/10W 0603", Case Code - in=0603, Case Code - mm=1608, Manufacturer=Yageo, Operating Temperature Range="- 55 C to + 155 C", Power Rating="100 mW", Resistance="100 kOhms", Supplier Part Number 1=311-100KHRCT-ND, Temperature Coefficient="100 PPM / C", Tolerance="1 %", Voltage Rating="50 V", ComponentLink1Description=http://www.farnell.com/datasheets/2167052.pdf?src-supplier=Element14, ComponentLink1URL=http://www.farnell.com/datasheets/2167052.pdf?src-supplier=Element14, ComponentLink2Description=http://www.farnell.com/datasheets/1868787.pdf?src-supplier=Element14, ComponentLink2URL=http://www.farnell.com/datasheets/1868787.pdf?src-supplier=Element14, ComponentLink3Description=http://documents.rs-components.com/techlib://itc_doclist_GB.htm?stockno=5048940&src-supplier=RSComponents, ComponentLink3URL=http://documents.rs-components.com/techlib://itc_doclist_GB.htm?stockno=5048940&src-supplier=RSComponents, ComponentLink4Description=http://www.farnell.com/datasheets/443971.pdf?src-supplier=Element14, ComponentLink4URL=http://www.farnell.com/datasheets/443971.pdf?src-supplier=Element14, Manufacturer Part Number=RC0603FR-07100KL, Packaging=Reel, Pricing 1="1=0.1, 10=0.022, 100=0.009, 1000=0.0041, 2500=0.0035 (USD)", Product="Thick Film Resistors General Purpose", Series=RC, Stock 1=13478446, Supplier 1=Digi-Key, Termination Style=SMD/SMT
R10: library part RMCF0603FT30K1, "RES SMD 30.1K OHM 1% 1/10W 0603", Case Code (Imperial)=0603, Case Code (Metric)=1608, Manufacturer="Stackpole Electronics", Max Operating Temperature=155°C, Max Power Dissipation=100mW, Min Operating Temperature=-55°C, Resistance=30.1kR, Resistor Type="Thick Film", Temperature Coefficient=100ppm/°C, Tolerance=1%, Case/Package=0603, Category="Chip SMD Resistors", ComponentLink1Description=http://components.arrow.com/part/dataview/44987904S7172006N1174?src-supplier=Arrow+Electronics, ComponentLink1URL=http://components.arrow.com/part/dataview/44987904S7172006N1174?src-supplier=Arrow+Electronics, ComponentLink2Description=https://www.seielect.com/catalog/SEI-Packaging.pdf?src-supplier=Digi-Key, ComponentLink2URL=https://www.seielect.com/catalog/SEI-Packaging.pdf?src-supplier=Digi-Key, ComponentLink3Description=https://www.seielect.com/catalog/SEI-RMCF_RMCP.pdf?src-supplier=Avnet, ComponentLink3URL=https://www.seielect.com/catalog/SEI-RMCF_RMCP.pdf?src-supplier=Avnet, ComponentLink4Description=https://www.seielect.com/catalog/SEI-RMCF_RMCP.pdf?src-supplier=Avnet+Asia, ComponentLink4URL=https://www.seielect.com/catalog/SEI-RMCF_RMCP.pdf?src-supplier=Avnet+Asia, ComponentLink5Description=https://www.seielect.com/Catalog/SEI-RMCF_RMCP.pdf?src-supplier=Digi-Key, ComponentLink5URL=https://www.seielect.com/Catalog/SEI-RMCF_RMCP.pdf?src-supplier=Digi-Key, ComponentLink6Description=https://www.verical.com/server-webapp/html/getDatasheet?partID=717621&src-supplier=Verical, ComponentLink6URL=https://www.verical.com/server-webapp/html/getDatasheet?partID=717621&src-supplier=Verical, Construction=Rectangular, Contact Plating=Tin,Matte, Depth=0.8mm, Features="Automotive AEC-Q200", Height=0.022inch, Length=1.55mm, Manufacturer Part Number=RMCF0603FT30K1, Military Standard=Not, Mount="Surface Mount", Number of Terminations=2, Packaging="Tape and Reel", Power Rating=100mW, Pricing 1="1=0.10000, 10=0.01600, 100=0.00650, 1000=0.00292, 2500=0.00253 (USD)", Radiation Hardening=No, RoHS=Yes, RoHS Compliant=Yes, Series=RMCF, Stock 1=307080, Supplier 1=Digi-Key, Width=0.031inch
R13: library part CRCW0603340KFKEA, "VISHAY - CRCW0603340KFKEA - SMD Chip Resistor, 0603 [1608 Metric], 340 kohm, CRCW e3 Series, 75 V, Thick Film, 100 mW", Case Code (Imperial)=0603, Case Code (Metric)=1608, Manufacturer=Vishay, Max Operating Temperature=155°C, Max Power Dissipation=100mW, Min Operating Temperature=-55°C, Package Quantity=10, Resistance=340kR, Resistance Tolerance=1%, Resistor Type="Thick Film", Temperature Coefficient=100ppm/°C, Voltage Rating=75V, Case/Package=0603, Category="Chip SMD Resistors", ComponentLink1Description=https://datasheet.ciiva.com/2466/dcrcwe3-2466626.pdf?src-supplier=Digi-Key, ComponentLink1URL=https://datasheet.ciiva.com/2466/dcrcwe3-2466626.pdf?src-supplier=Digi-Key, ComponentLink2Description=https://datasheet.ciiva.com/2466/dcrcwe3-2466627.pdf?src-supplier=Digi-Key, ComponentLink2URL=https://datasheet.ciiva.com/2466/dcrcwe3-2466627.pdf?src-supplier=Digi-Key, ComponentLink3Description=https://datasheet.ciiva.com/2466/dcrcwe3-2466628.pdf?src-supplier=Digi-Key, ComponentLink3URL=https://datasheet.ciiva.com/2466/dcrcwe3-2466628.pdf?src-supplier=Digi-Key, ComponentLink4Description=https://datasheet.ciiva.com/3257/dcrcwe3-3257477.pdf?src-supplier=Avnet, ComponentLink4URL=https://datasheet.ciiva.com/3257/dcrcwe3-3257477.pdf?src-supplier=Avnet, ComponentLink5Description=https://datasheet.ciiva.com/7674/1697337-7674078.pdf?src-supplier=Element14, ComponentLink5URL=https://datasheet.ciiva.com/7674/1697337-7674078.pdf?src-supplier=Element14, ComponentLink6Description=https://datasheet.ciiva.com/5548/dcrcwe3-109170-5548476.pdf?src-supplier=Mouser, ComponentLink6URL=https://datasheet.ciiva.com/5548/dcrcwe3-109170-5548476.pdf?src-supplier=Mouser, ComponentLink7Description=https://datasheet.ciiva.com/7674/1697337-7674079.pdf?src-supplier=Element14, ComponentLink7URL=https://datasheet.ciiva.com/7674/1697337-7674079.pdf?src-supplier=Element14, Construction=Rectangular, Contact Plating=Tin, Depth=0.85mm, Features="Automotive AEC-Q200", Height=0.02inch, Lead Free="Lead Free", Length=1.55mm, Manufacturer Part Number=CRCW0603340KFKEA, Military Standard=Not, Number of Pins=2, Number of Terminations=2, Packaging="Tape and Reel", Power Rating=100mW, Pricing 1="1=0.10000, 10=0.03400, 100=0.01390, 1000=0.00624, 2500=0.00542 (USD)", Radiation Hardening=No, REACH SVHC=Unknown, RoHS=Yes, RoHS Compliant=Yes, Series=CRCW, Size Code=0603, Stock 1=9256, Supplier 1=Digi-Key, Termination=SMD/SMT, Tolerance=1%, Voltage Rating (DC)=75V, Weight=7.1E-05oz, Width=0.033inch
R14: library part RMCF0603JG15K0, "SWITCH SLIDE DIP SPST 50MA 24V", Case Code (Imperial)=0603, Case Code (Metric)=1608, Current Rating=50mA, Manufacturer="Stackpole Electronics", Max Operating Temperature=155°C, Max Power Dissipation=100mW, Min Operating Temperature=-55°C, Package Quantity=1, Resistance=15kR, Resistor Type="Thick Film", Temperature Coefficient=200ppm/°C, Tolerance=5%, Voltage Rating (DC)=24V, Actuator Type="Slide (Standard)", Body Material=Plastic, Case/Package=0603, Category="Chip SMD Resistors", ComponentLink1Description=https://www.seielect.com/catalog/SEI-Packaging.pdf?src-supplier=Digi-Key, ComponentLink1URL=https://www.seielect.com/catalog/SEI-Packaging.pdf?src-supplier=Digi-Key, ComponentLink2Description=https://www.seielect.com/catalog/SEI-RMCF_RMCP.pdf?src-supplier=Avnet, ComponentLink2URL=https://www.seielect.com/catalog/SEI-RMCF_RMCP.pdf?src-supplier=Avnet, ComponentLink3Description=https://datasheet.ciiva.com/16370/206-208-16370206.pdf?src-supplier=Future+Electronics, ComponentLink3URL=https://datasheet.ciiva.com/16370/206-208-16370206.pdf?src-supplier=Future+Electronics, ComponentLink4Description=https://datasheet.ciiva.com/2863/206-208-2863487.pdf?src-supplier=Digi-Key, ComponentLink4URL=https://datasheet.ciiva.com/2863/206-208-2863487.pdf?src-supplier=Digi-Key, Contact Material="Copper Alloy", Contact Plating=Tin,Matte, Depth=9.78mm, Electrical Life=10000Cycles, Features="Automotive AEC-Q200", Height=0.022inch, Lead Free="Lead Free", Length=0.061inch, Manufacturer Part Number=RMCF0603JG15K0, Max Current Rating=50mA, Mount="Surface Mount", Number of Positions=2, Number of Terminations=2, Orientation=Straight, Packaging="Tape and Reel", Pitch=0.1inch, Pricing 1="1=0.10000, 10=0.01400, 100=0.00580, 1000=0.00262, 2500=0.00228, 5000=0.00188 (USD)", Pricing 2="1=0.74000, 10=0.71500, 25=0.68760, 100=0.59680, 250=0.54452, 500=0.50600, 1000=0.45375, 2500=0.42625, 5000=0.39600 (USD)", Radiation Hardening=No, RoHS=Yes, RoHS Compliant=Yes, Series=RMCF, Stock 1=51631, Stock 2=7650, Supplier 1=Digi-Key, Supplier 2=Digi-Key, Terminal Pitch=2.54mm, Termination="PC Pin", Throw Configuration=SPST, Washable=No, Width=0.031inch
R15: library part RMCF0603FT60K4, "Res Thick Film 0603 60.4K Ohm 1% 1/10W 100ppm/C Molded SMD SMD Paper T/R", Case Code (Imperial)=0603, Case Code (Metric)=1608, Manufacturer="Stackpole Electronics", Max Operating Temperature=155°C, Max Power Dissipation=100mW, Min Operating Temperature=-55°C, Resistance=60.4kR, Resistor Type="Thick Film", Temperature Coefficient=100ppm/°C, Tolerance=1%, Case/Package=0603, Category="Chip SMD Resistors", ComponentLink1Description=http://components.arrow.com/part/dataview/47797003S7054871N1174?src-supplier=Arrow+Electronics, ComponentLink1URL=http://components.arrow.com/part/dataview/47797003S7054871N1174?src-supplier=Arrow+Electronics, ComponentLink2Description=https://www.verical.com/server-webapp/html/getDatasheet?partID=493745&src-supplier=Verical, ComponentLink2URL=https://www.verical.com/server-webapp/html/getDatasheet?partID=493745&src-supplier=Verical, ComponentLink3Description=https://www.seielect.com/catalog/SEI-RMCF_RMCP.pdf?src-supplier=Avnet, ComponentLink3URL=https://www.seielect.com/catalog/SEI-RMCF_RMCP.pdf?src-supplier=Avnet, ComponentLink4Description=https://www.seielect.com/Catalog/SEI-RMCF_RMCP.pdf?src-supplier=Digi-Key, ComponentLink4URL=https://www.seielect.com/Catalog/SEI-RMCF_RMCP.pdf?src-supplier=Digi-Key, ComponentLink5Description=https://www.seielect.com/catalog/SEI-Packaging.pdf?src-supplier=Digi-Key, ComponentLink5URL=https://www.seielect.com/catalog/SEI-Packaging.pdf?src-supplier=Digi-Key, ComponentLink6Description=https://www.seielect.com/catalog/SEI-RMCF_RMCP.pdf?src-supplier=Avnet+Asia, ComponentLink6URL=https://www.seielect.com/catalog/SEI-RMCF_RMCP.pdf?src-supplier=Avnet+Asia, Construction=Rectangular, Contact Plating=Tin,Matte, Depth=0.8mm, Features="Automotive AEC-Q200", Height=0.022inch, Length=1.55mm, Manufacturer Part Number=RMCF0603FT60K4, Military Standard=Not, Mount="Surface Mount", Number of Terminations=2, Packaging="Tape and Reel", Pricing 1="1=0.10000, 10=0.01600, 100=0.00650, 1000=0.00292, 2500=0.00253 (USD)", Radiation Hardening=No, RoHS=Yes, RoHS Compliant=Yes, Series=RMCF, Stock 1=81528, Supplier 1=Digi-Key, Width=0.031inch
R17: library part CRCW0603200KFKEA, "VISHAY - CRCW0603200KFKEA - SMD Chip Resistor, 0603 [1608 Metric], 200 kohm, CRCW e3 Series, 75 V, Thick Film, 100 mW", Case Code (Imperial)=0603, Case Code (Metric)=1608, Manufacturer=Vishay, Max Operating Temperature=155°C, Max Power Dissipation=100mW, Min Operating Temperature=-55°C, Package Quantity=10, Resistance=200kR, Resistance Tolerance=1%, Resistor Type="Thick Film", Temperature Coefficient=100ppm/°C, Voltage Rating=75V, Case/Package=0603, Category="Chip SMD Resistors", ComponentLink1Description=https://datasheet.ciiva.com/11808/0900766b80d98afc-11808389.pdf?src-supplier=RSComponents, ComponentLink1URL=https://datasheet.ciiva.com/11808/0900766b80d98afc-11808389.pdf?src-supplier=RSComponents, ComponentLink2Description=https://datasheet.ciiva.com/2465/dcrcwe3-2465731.pdf?src-supplier=Digi-Key, ComponentLink2URL=https://datasheet.ciiva.com/2465/dcrcwe3-2465731.pdf?src-supplier=Digi-Key, ComponentLink3Description=https://datasheet.ciiva.com/16199/dcrcwe3-16199205.pdf?src-supplier=Future+Electronics, ComponentLink3URL=https://datasheet.ciiva.com/16199/dcrcwe3-16199205.pdf?src-supplier=Future+Electronics, ComponentLink4Description=https://datasheet.ciiva.com/7714/1697337-7714246.pdf?src-supplier=Element14, ComponentLink4URL=https://datasheet.ciiva.com/7714/1697337-7714246.pdf?src-supplier=Element14, ComponentLink5Description=https://datasheet.ciiva.com/3257/dcrcwe3-3257230.pdf?src-supplier=Avnet, ComponentLink5URL=https://datasheet.ciiva.com/3257/dcrcwe3-3257230.pdf?src-supplier=Avnet, ComponentLink6Description=https://datasheet.ciiva.com/3257/dcrcwe3-3257231.pdf?src-supplier=Avnet, ComponentLink6URL=https://datasheet.ciiva.com/3257/dcrcwe3-3257231.pdf?src-supplier=Avnet, ComponentLink7Description=https://datasheet.ciiva.com/2465/dcrcwe3-2465729.pdf?src-supplier=Digi-Key, ComponentLink7URL=https://datasheet.ciiva.com/2465/dcrcwe3-2465729.pdf?src-supplier=Digi-Key, ComponentLink8Description=https://datasheet.ciiva.com/2465/dcrcwe3-2465730.pdf?src-supplier=Digi-Key, ComponentLink8URL=https://datasheet.ciiva.com/2465/dcrcwe3-2465730.pdf?src-supplier=Digi-Key, ComponentLink9Description=https://datasheet.ciiva.com/5546/dcrcwe3-109170-5546041.pdf?src-supplier=Mouser, ComponentLink9URL=https://datasheet.ciiva.com/5546/dcrcwe3-109170-5546041.pdf?src-supplier=Mouser, ComponentLink10Description=https://datasheet.ciiva.com/16893/dcrcwe3-16893833.pdf?src-supplier=Avnet+Europe, ComponentLink10URL=https://datasheet.ciiva.com/16893/dcrcwe3-16893833.pdf?src-supplier=Avnet+Europe, Construction=Rectangular, Contact Plating=Tin, Depth=0.85mm, Features="Automotive AEC-Q200", Height=0.45mm, Lead Free="Lead Free", Length=1.55mm, Manufacturer Part Number=CRCW0603200KFKEA, Military Standard=Not, Mount="Surface Mount", Number of Terminations=2, Packaging="Tape and Reel", Power Rating=100mW, Pricing 1="5000=0.00192, 10000=0.00189, 20000=0.00184, 30000=0.00180, 40000=0.00173, 50000=0.00169, 500000=0.00165 (USD)", Radiation Hardening=No, REACH SVHC=Unknown, RoHS=Yes, RoHS Compliant=Yes, Series=CRCW, Stock 1=660000, Supplier 1=Avnet, Technology="THICK FILM", Termination=SMD/SMT, Tolerance=1%, Voltage Rating (DC)=75V, Weight=7.1E-05oz, Width=0.033inch, Working Voltage=75V